# Altium PCB PCB1.PcbDoc
Units mil, origin at the board's own origin, x right, y up, seen from the top; angles counter-clockwise.
Board outline 6000 x 4000 mil, 2 copper layers (Top Layer, Bottom Layer); 39 components, 24 nets, 102 pads, 6 vias.
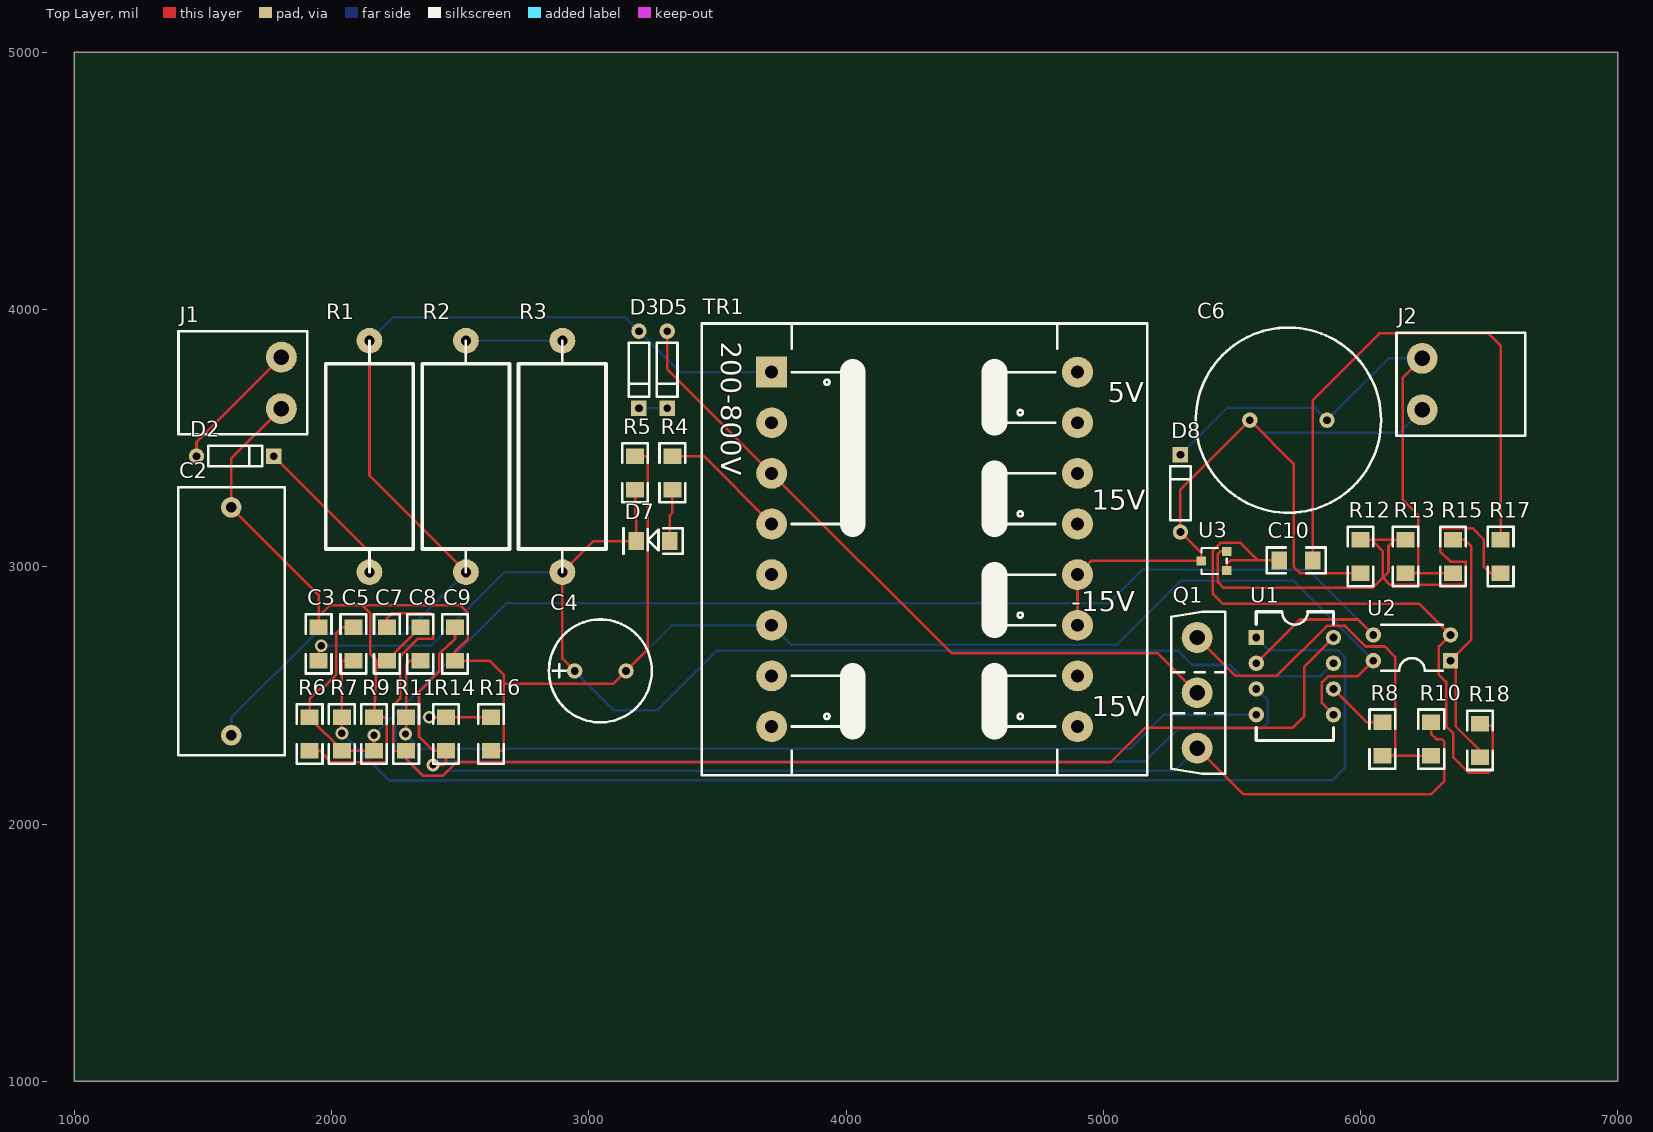
[diagram p0: Top Layer view]
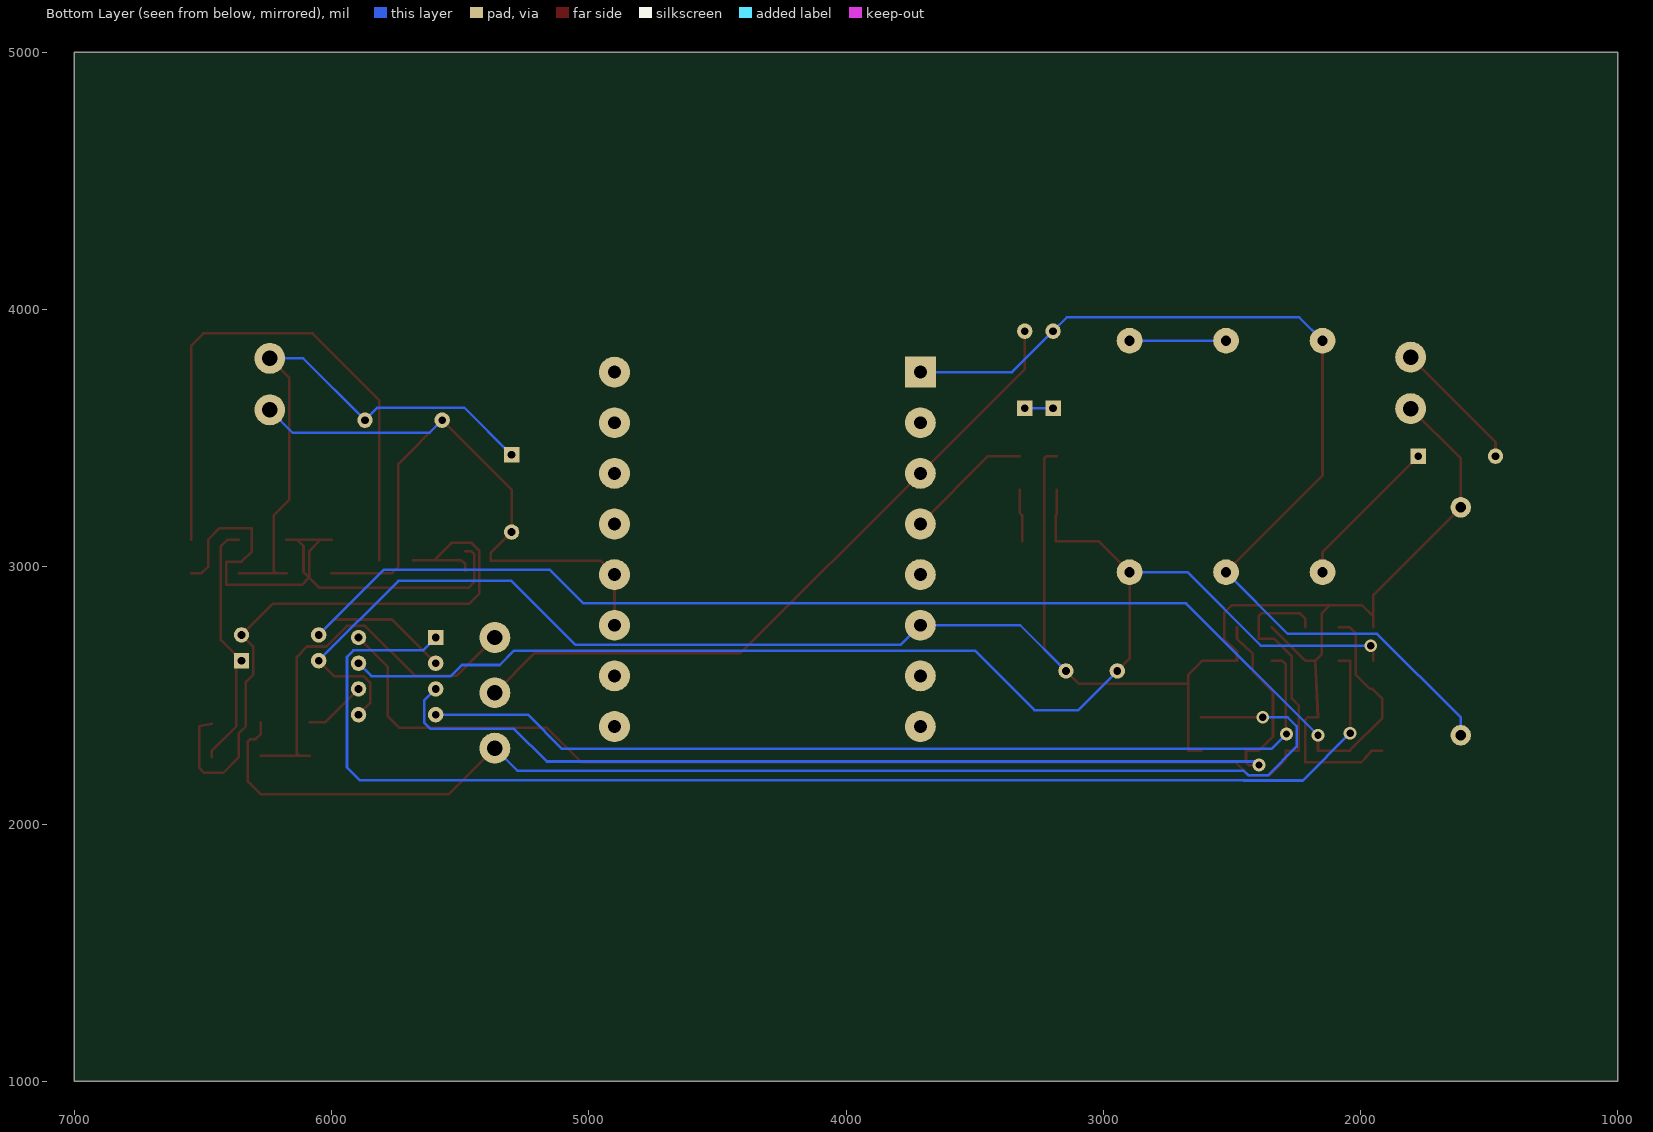
[diagram p1: Bottom Layer view, seen from below]

## Layer stack, top to bottom
Top Solder: solder mask 0.4, Solder Resist, Dk 3.5
Top Layer: signal copper 1.4
Dielectric 1: dielectric 12.6, FR-4, Dk 4.8
Bottom Layer: signal copper 1.4
Bottom Solder: solder mask 0.4, Solder Resist, Dk 3.5

## Board outline
1000,1000 7000,1000 7000,5000 1000,5000

## Design rules (kind name [scope] priority, off if disabled: settings)
Clearance [All] p1: gap=10 ignorepadtopadclearanceinfootprint=FALSE
PolygonConnect [All] p1: connectstyle=Relief reliefconductorwidth=10 reliefentries=4 polygonreliefangle="90 Angle" airgapwidth=10
RoutingVias [All] p1: holewidth=28 width=50 viastyle="Through Hole" minholewidth=28 minwidth=50 maxholewidth=28 maxwidth=50
SolderMaskExpansion [All] p1: expansion=4 istentingtop=FALSE
SupplyNets "Schematic Supply Nets_1" [InNet('GND')] p1: voltage=0.000
Width [All] p1: maxlimit=10 minlimit=10 preferedwidth=10
30 further rules are at their usual default settings.

## Components (designator, comment, footprint, x,y, rotation, side; value= is the part's Value field where it differs from the comment)
C2 "220nF/1000V" MKP_R22,5_26,5x10,5 1610,2345 r90 top
C3 "0.22-1 uF" 1206_O 1950,2765 r270 top
C4 "100uF/50V" AL04/10 2945,2595 r180 top
C5 "100pF" 1206_O 2085,2635 r90 top
C6 "680uF/25V" AL04/18 5870,3570 r0 top
C7 "10nF" 1206_O 2215,2635 r90 top
C8 "1.5nF/5%" 1206_O 2345,2635 r90 top
C9 "470pF" 1206_O 2480,2635 r90 top
C10 "100mF" 1206_O 5685,3025 r0 top
D2 "SUF4007" DO-35 1775,3430 r180 top
D3 "1.5KE400A" DO-35 3195,3616 r90 top
D5 "SUF4007" DO-35 3305,3616 r90 top
D7 "MUR120" 1206_D 3315,3100 r180 top
D8 "BYW98/200" DO-35 5300,3435 r270 top
J1 "CON2" MSTB/2A 1805,3615 r180 top
J2 "CON2" MSTB/2A 6240,3810 r0 top
Q1 "C3M0045065K" TO-247AC_V 5365,2725 r270 top
R1 "3.9R" MLT2 2147.5,3879 r270 top
R2 "150k" MLT2 2522.5,3879 r270 top
R3 "150k" MLT2 2897.5,2979 r90 top
R4 "4.7R" 1206_O 3325,3300 r90 top
R5 "18k" 1206_O 3180,3300 r90 top
R6 "10K" 1206_O 1915,2285 r90 top
R7 "150k" 1206_O 2040,2285 r90 top
R8 "33R" 1206_O 6085,2395 r270 top
R9 "10K" 1206_O 2165,2285 r90 top
R10 "1k" 1206_O 6275,2395 r270 top
R11 "10k" 1206_O 2290,2285 r90 top
R12 "2.7k" 1206_O 6000,2975 r90 top
R13 "15k" 1206_O 6175,2975 r90 top
R14 "1k" 1206_O 2445,2285 r90 top
R15 "2.7k" 1206_O 6360,2975 r90 top
R16 "0.47R" 1206_O 2620,2285 r90 top
R17 "3.3k" 1206_O 6545,2975 r90 top
R18 "1k" 1206_O 6465,2390 r270 top
TR1 "PQ32/30" ETD39 3711.02,3756.85 r0 top
U1 "UC3844" DIP8 5595,2725 r180 top
U2 "PC817" DIP4 6350,2635 r0 top
U3 "TL431" SOT23 5480,2985.2 r90 top

## Footprints (in the part's own frame and the unit in brackets; to place one, negate y for a bottom-side part, rotate by r counter-clockwise, add the part's x,y. Pads: shape width x height; smd on the part's side, far side on the other; paste and mask are expansions set on the pad)
1206_D [mil]
  rect 60x70 smd: A(0,0) K(130,0)
  silkscreen extent -50,-50 180,50
1206_O [mil]
  rect 60x70 smd: 1(0,0) 2(130,0)
  silkscreen extent -50,-50 180,50
AL04/10 [mil]
  round 60 hole 30: 1(0,0) 2(-200,0)
  silkscreen extent -300,-200 100,200
AL04/18 [mil]
  round 60 hole 30: 1(0,0) 2(-300,0)
  silkscreen extent -510,-360 210,360
DIP4 [mil]
  rect 60x60 hole 30: 1(0,0)
  round 60 hole 30: 2(0,100) 3(-300,100) 4(-300,0)
  silkscreen extent -270,-40 -30,140
DIP8 [mil]
  rect 60x60 hole 30: 1(0,0)
  round 60 hole 30: 2(0,100) 3(0,200) 4(0,300) 5(-300,300) 6(-300,200) 7(-300,100) 8(-300,0)
  silkscreen extent -300,-100 0,400
DO-35 [mil]
  round 60 hole 30: A(300,0)
  rect 60x60 hole 30: K(0,0)
  silkscreen extent 45,-40 255,40
ETD39 [mil]
  rect 120x120 hole 50: 1(0,0)
  round 120 hole 50: 2(0,-196.85) 3(0,-393.7) 4(0,-590.55) 5(0,-787.4) 6(0,-984.25) 7(0,-1181.1) 8(0,-1377.95) 9(1188.98,-1377.95) 10(1188.98,-1181.1) 11(1188.98,-984.25) 12(1188.98,-787.4) 13(1188.98,-590.55) 14(1188.98,-393.7) 15(1188.98,-196.85) 16(1188.98,0)
  silkscreen extent -272,-1567 1461,189
MKP_R22,5_26,5x10,5 [mil] "MKP Capacitor"
  round 80 hole 40: 1(0,0) 2(885.83,0)
  silkscreen extent -78,-208 964,207, body extent -77,-208 964,205, height 866
MLT2 [mil]
  round 100 hole 40: 1(0,0) 2(900,0)
  silkscreen extent 0,-170 900,170
MSTB/2A [mil]
  round 120 hole 60: 1(0,0) 2(0,-200)
  silkscreen extent -100,-300 400,100
SOT23 [mm]
  rect 0.9x0.95 smd: B(0,0) C(0.95,2.5) E(1.9,0)
  silkscreen extent -0.35,0 2.25,2.5
TO-247AC_V [mil]
  round 120 hole 60: B(0,0) C(215,0) E(430,0)
  silkscreen extent -100,-100 530,110

## Part data
C2 C3 C5 C7 C8 C9 C10: library part C, "Capacitor"
C4 C6: library part C-EL, "Electrolytic Capacitor"
D2 D5 D7 D8: library part DIODE
D3: library part DIODE_SCHOTTKY
J1 J2: "Connector"
Q1: library part MOSFET, "MOSFET"
R1 R2 R3 R4 R5 R6 R7 R8 R9 R10 R11 R12 R13 R14 R15 R16 R17 R18: library part R
TR1: library part TRANS9
U2: library part OPTOISO1, "Optoisolator"
U3: library part VREF_SOT23

## Via types
v1: diameter 50, hole 28, Top Layer to Bottom Layer, 6 vias

## Nets (pads, with @x,y where several pads share a name; then routed paths per layer and width w, separated by ;. In a path a pad name is that pad's centre, name@x,y a point inside that pad or via, vN(x,y) a via of type N, cw(c..) or ccw(c..) an arc to the next point about the centre after c; other vN are vias at no path point)
GND: C2.2 C3.1 C4.2 C7.1 C8.2 C9.1 J1.1 R5.2 R6.1 R9.2 R16.1 TR1.6 U1.5 U2.4 | length 8698.9
  Top Layer w10: J1.1 1610,3420 C2.2 1950,2890.83 1950,2806 ; R6.1 1955,2285 1977,2263 1977,2260 1997,2240 2215,2240 2215,2405 2205,2415 R9.2 2175,2635 ; C3.1 1950,2806 ; C8.2 C7.1 2175,2635 ; R16.1 2670,2285 2670,2546 ; R5.2 3220,3430 3230,3420 3230,2680 C4.2 3096,2546 2670,2546 ; U1.5 5850,2470 5850,2550 5875,2575 5990,2575 U2.4 ; 1950,2806 1995,2851 2119,2851 ; 2119,2851 2499,2851 2530,2820 2530,2720 2480,2670 C9.1 2615,2635 2670,2580 2670,2546 ; 2119,2851 2150,2820 2150,2660 2175,2635
  Bottom Layer w10: C4.2 3322.6,2772.6 TR1.6 3786.62,2697 5053,2697 5301,2945 5740,2945 U2.4
NetC2_1: C2.1 D3.A R1.1 R2.2 TR1.1 | length 3960.5
  Top Layer w10: R1.1 2147.5,3354 R2.2
  Bottom Layer w10: C2.1 1610,2414.22 1935,2739.22 2282.72,2739.22 R2.2 ; R1.1 2238.5,3970 3141,3970 D3.A 3354.15,3756.85 TR1.1
NetC3_2: C3.2 C4.1 D7.K R3.1 R5.1 U1.7 | length 5231.8
  Top Layer w10: C3.2 1950,2683 v1(1960,2693) ; C4.1 2897.5,2642.5 R3.1 3018.5,3100 D7.K 3185,3200 3180,3205 R5.1
  Bottom Layer w10: v1(1960,2693) 2387,2693 2673,2979 R3.1 ; C4.1 3097,2443 3268,2443 3499,2674 5290,2674 5346,2618 5493,2618 5536,2575 5845,2575 U1.7
NetC5_1: C5.1 R7.2 U1.1 | length 5130.4
  Top Layer w10: v1(2040,2353) R7.2 2040,2635 C5.1
  Bottom Layer w10: v1(2040,2353) 2224,2169 2454,2169 2455,2170 5890,2170 5940,2220 5940,2650 5915,2675 5645,2675 U1.1
NetC5_2: C5.2 R6.2 R7.1 R9.1 U1.2 U2.3 | length 5624.3
  Top Layer w10: C5.2 2043,2765 2018,2740 2018,2580 1964,2526 1955,2526 1915,2486 R6.2 1915,2412 2040,2287 R7.1 R9.1 v1(2165,2345) ; U1.2 5765,2795 5990,2795 U2.3
  Bottom Layer w10: v1(2165,2345) 2678,2858 5021,2858 5152,2989 5796,2989 U2.3
NetC6_1: C6.1 D8.K J2.1 R13.1 R15.1 | length 2216
  Top Layer w10: R13.1 6215,2975 ; J2.1 6165,3735 6165,3260 6225,3200 6225,2985 6215,2975 ; R15.1 6215,2975
  Bottom Layer w10: D8.K 5484,3619 5821,3619 C6.1 6110,3810 J2.1
NetC6_2: C6.2 D8.A J2.2 R12.1 TR1.11 TR1.12 U3.C | length 3031.4
  Top Layer w10: TR1.11 TR1.12 4953.15,3022.6 U3.C 5381.57,3053.43 D8.A 5300,3300 C6.2 5740,3400 5740,3000 5765,2975 R12.1
  Bottom Layer w10: C6.2 5619,3521 6151,3521 J2.2
NetC7_2: C7.2 R11.1 U1.8 | length 4900
  Top Layer w10: C7.2 2215,2799 2235,2819 2385,2819 2395,2809 2395,2720 2335,2720 2267,2652 2267,2487 2240,2460 2240,2285 R11.1 2290,2252 2355,2187 2432.26,2187 2485.26,2240 5029,2240 5164,2375 5737,2375 5782,2420 5782,2612 U1.8
NetC8_1: C8.1 R11.2 U1.4 | length 3718.2
  Top Layer w10: v1(2288,2350) 2290,2352 R11.2 2290,2620 2305,2635 C8.1
  Bottom Layer w10: v1(2288,2350) 2346,2292 5104,2292 5237,2425 U1.4
NetC9_2: C9.2 R14.1 U1.3 | length 4176.5
  Top Layer w10: v1(2394,2229) 2435,2229 2445,2239 R14.1 2395,2285 2340,2340 2340,2514 2418,2592 2418,2660 2458,2700 2460,2700 2480,2720 C9.2
  Bottom Layer w10: v1(2394,2229) 2408,2243 5163,2243 5290,2370 5615,2370 5640,2395 5640,2480 U1.3
NetC10_1: C10.1 R18.1 U2.2 U3.B | length 2528.4
  Top Layer w10: U3.B 5480,3010 5495,3025 5602,3025 ; C10.1 5602,3025 ; R18.1 6515,2380 6515,2219 6495,2199 6421,2199 6360,2260 6360,2353 6333,2380 6333,2552 6305,2580 6305,2690 U2.2 6228,2857 5464,2857 5426,2895 5426,3064 5455,3093 5534,3093 5602,3025
NetC10_2: C10.2 R17.2 | length 2234.7
  Top Layer w10: C10.2 5815,3648 6074,3907 6498,3907 6545,3860 R17.2
NetD2_A: D2.A J1.2 | length 521.7
  Top Layer w10: D2.A 1475,3485 J1.2
NetD2_K: D2.K R1.2 | length 605.3
  Top Layer w10: D2.K 2147.5,3057.5 R1.2
NetD3_K: D3.K D5.K | length 110
  Bottom Layer w10: D3.K D5.K
NetD5_A: D5.A Q1.C TR1.3 | length 2728.4
  Top Layer w10: D5.A 3305,3769.17 TR1.3 4411.17,2663 5212,2663 Q1.C
NetD7_A: D7.A R4.1 | length 204.1
  Top Layer w10: D7.A 3315,3200 3325,3210 R4.1
NetQ1_B: Q1.B R8.2 R10.2 | length 1540.1
  Top Layer w10: Q1.B 5513,2577 5676,2577 5869,2770 5940,2770 6020,2690 6095,2690 6135,2650 6135,2275 6125,2265 ; R8.2 6125,2265 ; R10.2 6125,2265
NetQ1_E: Q1.E R10.1 R14.2 R16.2 | length 4990.5
  Top Layer w10: v1(2380,2415) R14.2 R16.2 ; Q1.E 5545,2115 6275,2115 6325,2165 6325,2320 6315,2330 6295,2330 6275,2350 R10.1
  Bottom Layer w10: v1(2380,2415) 2283,2415 2248,2380 2248,2301 2360,2189 2436,2189 2454,2207 5277,2207 Q1.E
NetR2_1: R2.1 R3.2 | length 375
  Bottom Layer w10: R2.1 R3.2
NetR4_2: R4.2 TR1.4 | length 495.3
  Top Layer w10: R4.2 3447.32,3430 TR1.4
NetR8_1: R8.1 U1.6 | length 243.8
  Top Layer w10: U1.6 6025,2395 R8.1
NetR12_2: R12.2 R13.2 R17.1 U3.E | length 2322.1
  Top Layer w10: U3.E 5456,3060 5446,3050 5446,2940 5468,2918 6047,2918 6087,2958 ; R12.2 6042,3105 ; R13.2 6134,3105 ; R17.1 6505,2975 6480,3000 6480,3105 6435,3150 6310,3150 6310,3060 6350,3020 6410,3020 6410,2930 6115,2930 6087,2958 ; 6042,3105 6134,3105 ; 6042,3105 6087,3060 6087,2958 ; 6087,2958 6109,2980 6109,3080 6134,3105
NetR15_2: R15.2 R18.2 U2.1 | length 981.1
  Top Layer w10: R15.2 6405,3105 6430,3080 6430,2715 U2.1 6370,2615 6370,2380 6465,2285 R18.2
pads on no net: TR1.2 TR1.5 TR1.7 TR1.8 TR1.9 TR1.10 TR1.13 TR1.14 TR1.15 TR1.16

## Silkscreen, mask and mechanical layers (free items; w line width, h text height)
Mechanical 1:
  lines w10: 1320,4020 1320,4025 1360,4065 6630,4065 6715,3980 6715,2125 6660,2070 1415,2070 1320,2165 1320,4022.5

## Text inside footprints (layer, text, board x,y; h text height)
TR1: Top Overlay "5V" at 5018.11,3638.74 h78.74; Top Overlay "-15V" at 4876.38,2827.72 h78.74; Top Overlay "15V" at 4955.12,3221.42 h78.74; Top Overlay "200-800V" at 3514.17,3874.96 h78.74 r270; Top Overlay "15V" at 4955.12,2418.27 h78.74